# Altium PCB nRF52832_NanoDevKit.PcbDoc
Units mil, origin at the board's own origin, x right, y up, seen from the top; angles counter-clockwise.
Board outline 2860 x 1730 mil, 2 copper layers (Top Layer, Bottom Layer); 54 components, 64 nets, 215 pads, 168 vias.
Unrouted connection lines stored in the file: 6.
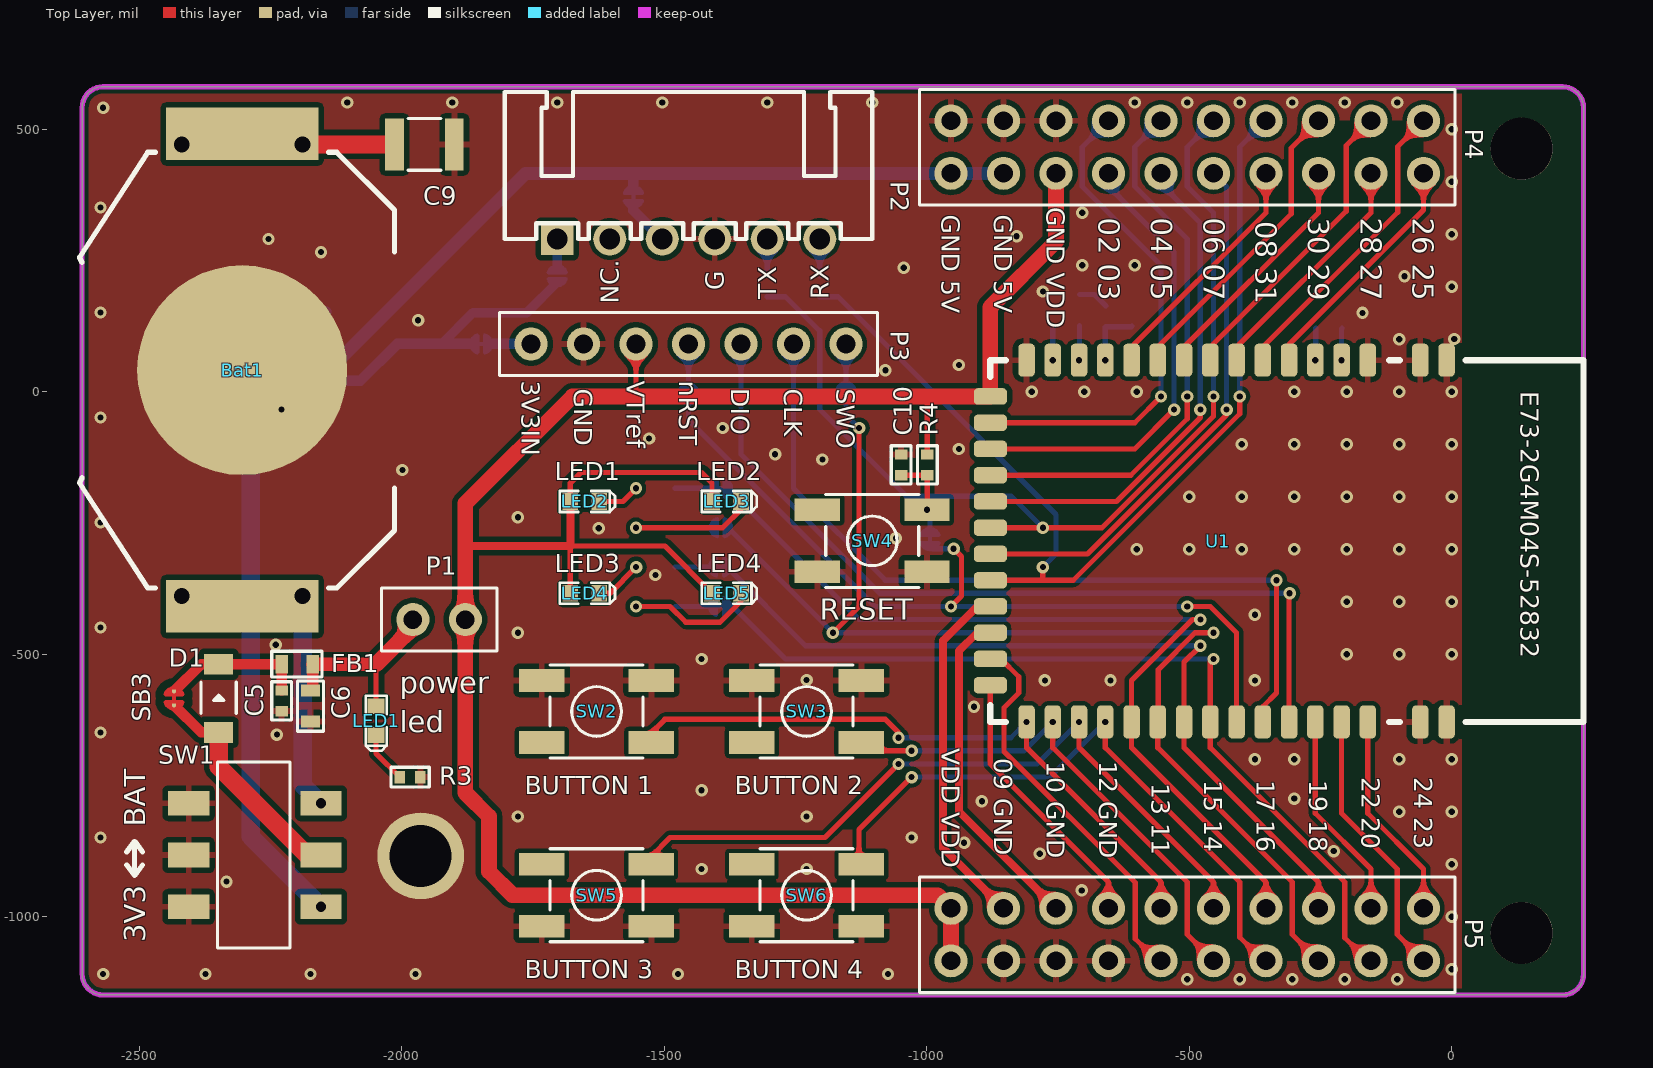
[diagram p0: Top Layer view]
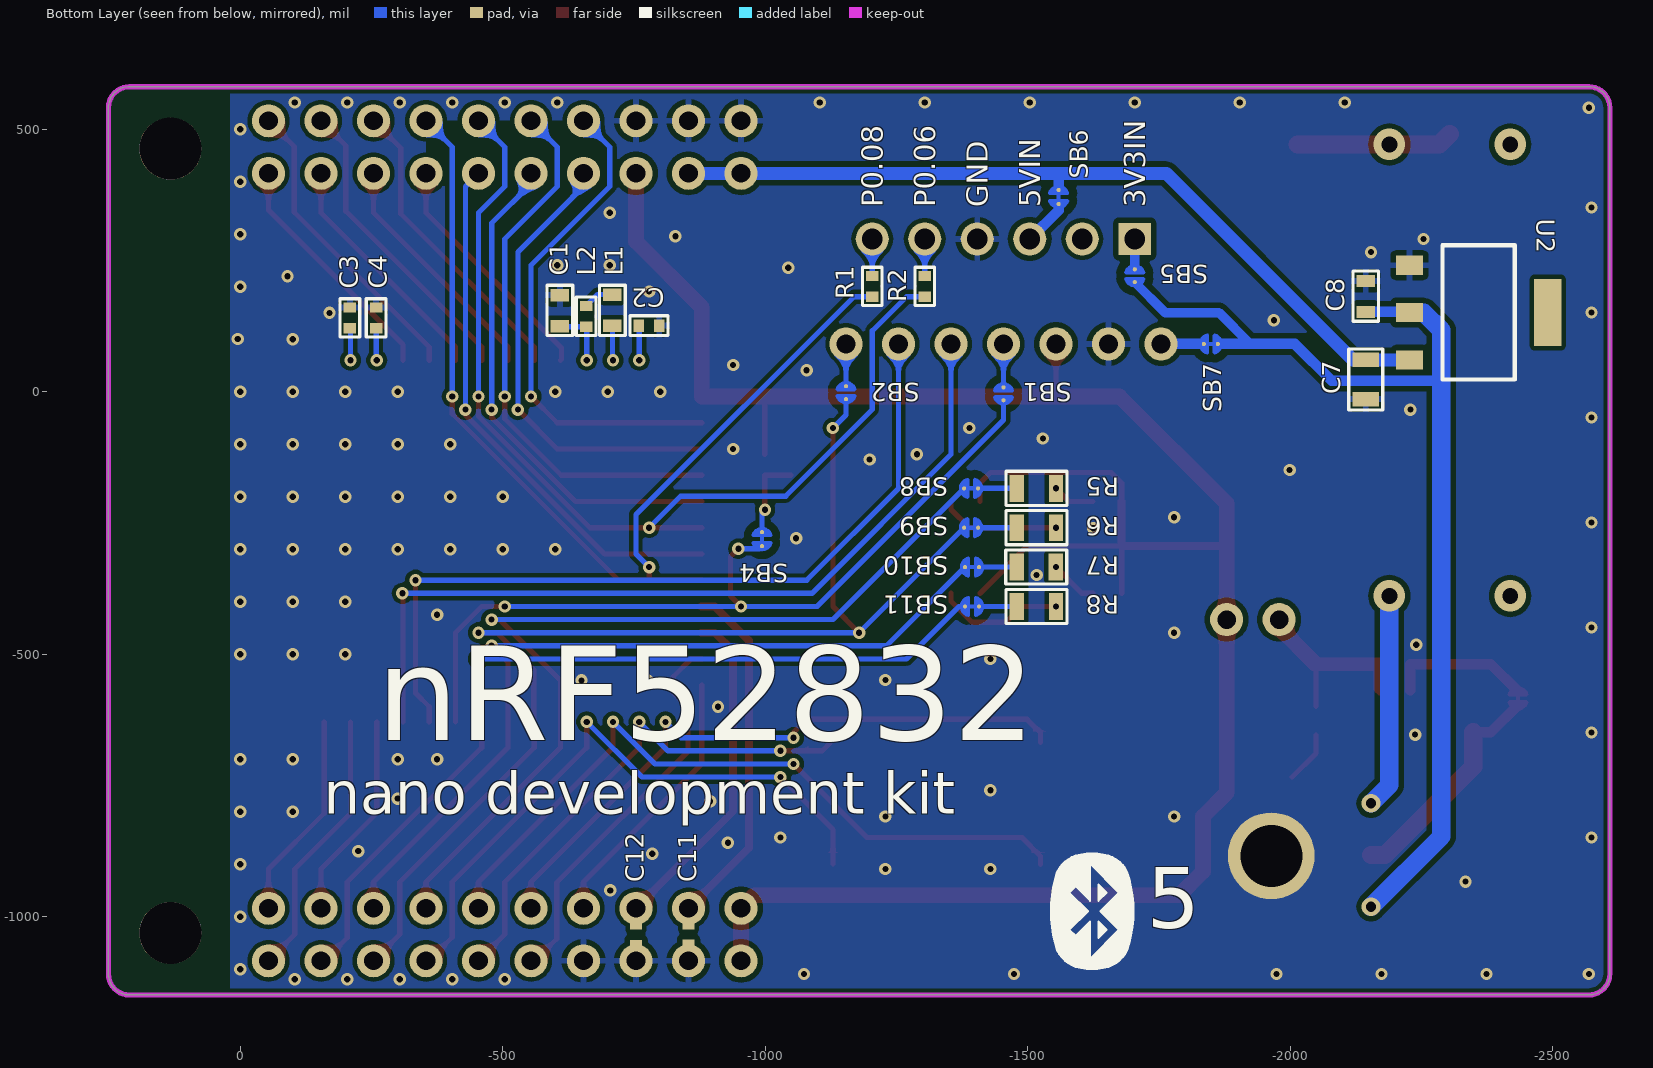
[diagram p1: Bottom Layer view, seen from below]

## Layer stack, top to bottom
Top Solder: solder mask 0.4, Solder Resist, Dk 3.5
Top Layer: signal copper 1.4
Dielectric 1: dielectric 12.6, FR-4, Dk 4.8
Bottom Layer: signal copper 1.4
Bottom Solder: solder mask 0.4, Solder Resist, Dk 3.5

## Board outline
-2608.9,-1109.09 ccw(c-2568.9,-1109.09) -2568.9,-1149.09 211.1,-1149.09 ccw(c211.1,-1109.09) 251.1,-1109.09 251.1,540.91 ccw(c211.1,540.91) 211.1,580.91 -2568.9,580.91 ccw(c-2568.9,540.91) -2608.9,540.91

## Design rules (kind name [scope] priority, off if disabled: settings)
Clearance SB_Clearance [HasFootprint('Solderbridge_Shorted') or HasFootprint('Solderbridge')] p1: gap=6 ignorepadtopadclearanceinfootprint=FALSE except(15: Arc-Fill Arc-Poly Arc-Region Track-Fill Track-Poly Track-Region SMDPad-Fill SMDPad-Poly SMDPad-Region THPad-Fill THPad-Poly THPad-Region Via-Fill Via-Poly Via-Region Fill-Fill Fill-Poly Fill-Region Poly-Poly Poly-Region Region-Region)
Clearance Power_Clearance [InNet('V5V') or InNet('V3V3') or InNet('VBAT')  or InNet ('VDD_nRF') or InNet('CP2102_3V3') or InNet('CP2102_5V') or InNet('J-link 3V3') or InNet('NetD1_2') or InNet('NetC5_2') or InNet('NetC6_2')] p2: gap=10 ignorepadtopadclearanceinfootprint=FALSE
Clearance [All] p3: gap=6 ignorepadtopadclearanceinfootprint=FALSE except(8: Arc-Fill Arc-Poly Arc-Region Track-Fill Track-Poly Track-Region SMDPad-Fill SMDPad-Poly SMDPad-Region THPad-Fill THPad-Poly THPad-Region Via-Fill Via-Poly Via-Region Fill-Fill Fill-Poly Fill-Region Poly-Poly Poly-Region Region-Region)
PolygonConnect PolygonConnect_1 [HasFootprint('CR2032_HOLDER') or HasPad('Free-1')] p1: connectstyle=Direct reliefconductorwidth=10 reliefentries=4 polygonreliefangle="90 Angle" airgapwidth=10
PolygonConnect PolygonConnect_Via [isVia and InNet('GND')] p2: connectstyle=Direct reliefconductorwidth=10 reliefentries=4 polygonreliefangle="90 Angle" airgapwidth=10
PolygonConnect [All] p3: connectstyle=Relief reliefconductorwidth=12 reliefentries=4 polygonreliefangle="90 Angle" airgapwidth=10
RoutingVias [All] p1: holewidth=39.37 width=62.99 viastyle="Through Hole" minholewidth=11.81 minwidth=23.62 maxholewidth=19.68 maxwidth=35.43
SolderMaskExpansion [All] p1: expansion=4
Width [All] p1: maxlimit=50 minlimit=6 preferedwidth=10
30 further rules are at their usual default settings.

## Classes and differential pairs
component class nRF52832&pin_map: C1 C2 C3 C4 L1 L2 R1 R2 SB1 SB2 U1
component class misc: Bat1 C5 C6 C7 C8 C9 C10 C11 C12 D1 FB1 LED1 LED2 LED3 LED4 LED5 P1 P2 P3 P4 P5 R3 R4 R5 R6 R7 R8 SB3 SB4 SB5 SB6 SB7 SB8 SB9 SB10 SB11 SW1 SW2 SW3 SW4 SW5 SW6 U2

## Components (designator, comment, footprint, x,y, rotation, side; value= is the part's Value field where it differs from the comment)
Bat1 "CR2032 Holder" CR2032_HOLDER -2303.9,40.91 r270 top locked
C1 "1µF" 0603_Imperial -608.9,183.98 r270 bottom
C2 "100nF" "0402 imperial" -798.27,125.91 r0 bottom
C3 "N.C." "0402 imperial" -208.9,160.28 r270 bottom
C4 "100pF" "0402 imperial" -258.9,160.28 r270 bottom
C5 "100nF" "0402 imperial" -2228.9,-608.46 r90 top
C6 "1µF" 0603_Imperial -2173.9,-628.15 r90 top
C7 "10µF" 0805_Imperial -2143.9,-14.09 r90 bottom
C8 "4.7µF" 0603_Imperial -2143.9,210.91 r270 bottom
C9 "100µF" 1210_Imperial -1899.72,470.91 r180 top
C10 "100nF" "0402 imperial" -1048.9,-119.72 r270 top
C11 "Ctuning" "0402 imperial" -853.9,-1014.09 r270 bottom
C12 "Ctuning" "0402 imperial" -753.9,-1054.09 r90 bottom
D1 "DIODE S4" SOD-123 -2348.9,-519.09 r270 top
FB1 "470R/3A" 0603_Imperial -2228.9,-519.09 r0 top
L1 "10µH" 0603_Imperial -708.9,125.91 r90 bottom
L2 "15nH" "0402 imperial" -658.9,163.31 r270 bottom
LED1 "Green" LED_0603 -2048.9,-654.09 r90 top
LED2 "LED1" LED_0603 -1623.9,-209.09 r180 top
LED3 "LED2" LED_0603 -1353.9,-209.09 r180 top
LED4 "LED3" LED_0603 -1623.9,-384.09 r180 top
LED5 "LED4" LED_0603 -1353.9,-384.09 r180 top
P1 "current measurement" CONN2.54MM2P -1978.9,-434.09 r0 top
P2 "6p, 2.54mm" CONNX2.54MM6P -1203.9,290.91 r0 top
P3 "for J-link" CONN2.54MM7P -1753.9,90.91 r0 top
P4 "10x2, 2.54mm" CONN2.54MM10X2 -53.9,515.91 r180 top
P5 "10x2, 2.54mm" CONN2.54MM10X2 -53.9,-984.09 r180 top
R1 "0R" "0402 imperial" -1203.9,180.91 r90 bottom
R2 "0R" "0402 imperial" -1303.9,180.91 r90 bottom
R3 "15K" "0402 imperial" -1964.53,-734.09 r180 top
R4 "100K" "0402 imperial" -998.9,-159.09 r90 top
R5 "680R" 0805_Imperial -1479.09,-184.09 r180 bottom
R6 "10K" 0805_Imperial -1479.09,-259.09 r180 bottom
R7 "1K" 0805_Imperial -1478.9,-334.09 r180 bottom
R8 "1K" 0805_Imperial -1479.09,-409.09 r180 bottom
SB1 "Solderbridge" Solderbridge#1 -1453.9,-4.09 r270 bottom
SB2 "Solderbridge" Solderbridge#2 -1153.9,-1.79 r270 bottom
SB3 "Solderbridge" Solderbridge_Shorted -2433.9,-584.09 r270 top net-tie
SB4 "Solderbridge" Solderbridge_Shorted -993.9,-280.79 r270 bottom net-tie
SB5 "Solderbridge" Solderbridge#2 -1703.9,220.91 r90 bottom
SB6 "Solderbridge" Solderbridge_Shorted -1558.9,370.91 r270 bottom net-tie
SB7 "Solderbridge" Solderbridge_Shorted -1848.9,90.91 r0 bottom net-tie
SB8 "Solderbridge" Solderbridge_Shorted -1392.2,-184.09 r0 bottom net-tie
SB9 "Solderbridge" Solderbridge_Shorted -1392.2,-259.09 r0 bottom net-tie
SB10 "Solderbridge" Solderbridge_Shorted -1393.9,-334.09 r0 bottom net-tie
SB11 "Solderbridge" Solderbridge_Shorted -1393.9,-409.09 r0 bottom net-tie
SW1 "MSS22D18" MSS22D18SMD -2153.9,-784.09 r90 top
SW2 "BUTTON 1" Switch-PB-4.5x4.5mm-SMD -1628.9,-609.09 r180 top
SW3 "BUTTON 2" Switch-PB-4.5x4.5mm-SMD -1228.9,-609.09 r180 top
SW4 "RESET" Switch-PB-4.5x4.5mm-SMD -1103.9,-284.09 r0 top
SW5 "BUTTON 3" Switch-PB-4.5x4.5mm-SMD -1628.9,-959.09 r0 top
SW6 "BUTTON 4" Switch-PB-4.5x4.5mm-SMD -1228.9,-959.09 r0 top
U1 "E73-2G4M04S1B" nRF52832-Ebyte -878.9,-9.09 r270 top locked
U2 "AMS1117-3.3" SOT229P700X180-4N -2358.9,150.91 r270 bottom

## Footprints (in the part's own frame and the unit in brackets; to place one, negate y for a bottom-side part, rotate by r counter-clockwise, add the part's x,y. Pads: shape width x height; smd on the part's side, far side on the other; paste and mask are expansions set on the pad)
"0402 imperial" [mm] "R, L, C"
  rect 0.5x0.6 smd: 1(0,0) 2(1,0)
  silkscreen extent -0.43,-0.48 1.43,0.48, body extent 0,-0.25 1,0.25, height 0.35
0603_Imperial [mm]
  rect 0.6x0.9 smd: 1(0,0) 2(1.5,0)
  silkscreen extent -0.48,-0.63 1.95,0.63, body extent -0.02,-0.42 1.53,0.43, height 0.35
0805_Imperial [mm]
  rect 0.7x1.3 smd: 1(0,0) 2(1.9,0)
  silkscreen extent -0.53,-0.82 2.42,0.82, body extent -0.05,-0.6 1.95,0.6, height 0.45
1210_Imperial [mm]
  rect 0.9x2.5 smd: 1(0,0) 2(2.9,0)
  silkscreen extent 0.65,-1.25 2.25,1.25, body extent -0.15,-1.25 3.05,1.25, height 0.55
CONN2.54MM2P [mm]
  round 1.6 hole 0.9: 1(0,0) 2(2.54,0)
  silkscreen extent -1.52,-1.52 4.06,1.52, body extent -1.27,-1.27 3.81,1.27, height 8.5
CONN2.54MM7P [mm]
  round 1.6 hole 0.9: 1(0,0) 2(2.54,0) 3(5.08,0) 4(7.62,0) 5(10.16,0) 6(12.7,0) 7(15.24,0)
  silkscreen extent -1.52,-1.52 16.76,1.52, body extent -1.27,-1.27 16.51,1.27, height 8.5
CONN2.54MM10X2 [mm]
  round 1.6 hole 0.9: 1(0,0) 2(0,2.54) 3(2.54,0) 4(2.54,2.54) 5(5.08,0) 6(5.08,2.54) 7(7.62,0) 8(7.62,2.54) 9(10.16,0) 10(10.16,2.54) 11(12.7,0) 12(12.7,2.54) 13(15.24,0) 14(15.24,2.54) 15(17.78,0) 16(17.78,2.54) 17(20.32,0) 18(20.32,2.54) 19(22.86,0) 20(22.86,2.54)
  silkscreen extent -1.52,-1.52 24.38,4.06, body extent -1.27,-1.27 24.13,3.81, height 8.5
CONNX2.54MM6P [mm]
  rect 1.55x1.55 hole 1: 1(-12.7,0)
  round 1.6 hole 1: 2(-10.16,0) 3(-7.62,0) 4(-5.08,0) 5(-2.54,0) 6(0,0)
  silkscreen extent -15.24,0 2.54,7.11, body extent -14.99,0.25 2.79,7.37, height 6
CR2032_HOLDER [mil] "BK-912 @ tme"
  rect 100x290 smd: 1(-450,0) 1(450,0)
  round 400 smd: 2(0,0)
  silkscreen extent -415,-310 415,290, body extent -455,-310 455,290, height 170
LED_0603 [mil]
  rect 30x32 smd: 1(0,0) 2(55,0)
  silkscreen extent -30,-20 75,20, body extent -4,-16 60,16, height 24
MSS22D18SMD [mm]
  rect 1.2x2 smd: 1(0,0) 2(-2.5,0) 3(-5,0) 4(0,6.4) 5(-2.5,6.4) 6(-5,6.4)
  silkscreen extent -7,1.5 2,5, body extent -6.75,0.1 1.75,6.35, height 3.5
nRF52832-Ebyte [mm]
  rrect50% 1.6x0.8 smd: 0(-1.755,22.07) 1(-1.755,20.8) 2(-1.755,18.26) 3(-1.755,16.99) 4(-1.755,15.72) 5(-1.755,14.45) 6(-1.755,13.18) 7(-1.755,11.91) 8(-1.755,10.64) 9(-1.755,9.37) 10(-1.755,8.1) 11(-1.755,6.83) 12(-1.755,5.56) 13(-1.755,4.29) 14(-1.755,3.02) 15(-1.755,1.75) 28(15.745,1.75) 29(15.745,3.02) 30(15.745,4.29) 31(15.745,5.56) 32(15.745,6.83) 33(15.745,8.1) 34(15.745,9.37) 35(15.745,10.64) 36(15.745,11.91) 37(15.745,13.18) 38(15.745,14.45) 39(15.745,15.72) 40(15.745,16.99) 41(15.745,18.26) 42(15.745,20.8) 43(15.745,22.07)
  rrect50% 0.8x1.6 smd: 16(0,0) 17(1.27,0) 18(2.54,0) 19(3.81,0) 20(5.08,0) 21(6.35,0) 22(7.62,0) 23(8.89,0) 24(10.16,0) 25(11.43,0) 26(12.7,0) 27(13.97,0)
  silkscreen extent -1.76,0 15.75,28.7, body extent -1.76,0 15.75,28.7, height 2.6
SOD-123 [mm]
  rect 1x1.4 smd: 1(0,0) 2(3.3,0)
  silkscreen extent 0.87,-0.85 2.37,0.85, body extent 0.23,-0.85 3.08,0.85, height 1.35
Solderbridge#1 [mm]
  round 0.2 smd paste-10: 1(-0.312,0) 2(0.312,0)
  Top Layer region: 0.077,0.432 0.152,0.505 0.271,0.467 0.335,0.424 0.409,0.351 0.462,0.292 0.521,0.193 0.549,0.099 0.544,-0.122 0.518,-0.193 0.434,-0.33 0.351,-0.411 0.259,-0.469 0.157,-0.5 0.107,-0.483 0.077,-0.43
  Top Layer region: -0.077,-0.432 -0.152,-0.505 -0.271,-0.467 -0.335,-0.424 -0.409,-0.351 -0.462,-0.292 -0.521,-0.193 -0.549,-0.099 -0.544,0.122 -0.518,0.193 -0.434,0.33 -0.351,0.411 -0.259,0.469 -0.157,0.5 -0.107,0.483 -0.077,0.43
  Top Layer lines w0.152: 0.153,0.431 cw(c0.042,0) 0.487,0 cw(c0.042,0) 0.461,-0.149 cw(c0.042,0) 0.153,-0.431 ; -0.153,0.431 ccw(c-0.042,0) -0.487,0 ccw(c-0.042,0) -0.153,-0.431
Solderbridge#2 [mm]
  round 0.2 smd paste-10: 1(-0.312,0) 2(0.312,0)
  Top Layer region: 0.077,0.432 0.152,0.505 0.271,0.467 0.335,0.424 0.409,0.351 0.462,0.292 0.521,0.193 0.549,0.099 0.544,-0.122 0.518,-0.193 0.434,-0.33 0.351,-0.411 0.259,-0.469 0.157,-0.5 0.107,-0.483 0.077,-0.43
  Top Layer region: -0.077,-0.432 -0.152,-0.505 -0.271,-0.467 -0.335,-0.424 -0.409,-0.351 -0.462,-0.292 -0.521,-0.193 -0.549,-0.099 -0.544,0.122 -0.518,0.193 -0.434,0.33 -0.351,0.411 -0.259,0.469 -0.157,0.5 -0.107,0.483 -0.077,0.43
  Top Layer lines w0.152: 0.153,0.431 cw(c0.042,0) 0.487,0 cw(c0.042,0) 0.153,-0.431 ; -0.153,0.431 ccw(c-0.042,0) -0.487,0 ccw(c-0.042,0) -0.153,-0.431
Solderbridge_Shorted [mm]
  round 0.2 smd paste-10: 1(-0.338,0) 2(0.338,0)
  Top Layer region: 0.102,0.432 0.178,0.505 0.296,0.467 0.361,0.424 0.434,0.351 0.488,0.292 0.546,0.193 0.574,0.099 0.569,-0.122 0.544,-0.193 0.46,-0.33 0.376,-0.411 0.284,-0.469 0.183,-0.5 0.132,-0.483 0.102,-0.43
  Top Layer region: -0.102,-0.432 -0.178,-0.505 -0.296,-0.467 -0.361,-0.424 -0.434,-0.351 -0.488,-0.292 -0.546,-0.193 -0.574,-0.099 -0.569,0.122 -0.544,0.193 -0.46,0.33 -0.376,0.411 -0.284,0.469 -0.183,0.5 -0.132,0.483 -0.102,0.43
  Top Layer lines w0.152: 0.178,-0.431 ccw(c0.068,0) 0.178,0.431 ; -0.178,-0.431 cw(c-0.068,0) -0.178,0.431
  Top Layer lines w0.203: 0.338,0 -0.338,0
SOT229P700X180-4N [mm]
  rect 0.93x1.31 smd: 1(-2.285,-3.345) 2(0.005,-3.345) 3(2.295,-3.345)
  rect 3.24x1.31 smd: 4(0.005,3.345)
  silkscreen extent -3.25,-1.75 3.25,1.75
Switch-PB-4.5x4.5mm-SMD [mm] "Tactile Switch, SPNO, SMD, 4.5x4.5x3.8mm"
  rect 2.2x1.1 smd: 1(-2.65,1.5) 2(-2.65,-1.5) 3(2.65,1.5) 4(2.65,-1.5)
  silkscreen extent -2.25,-2.25 2.25,2.25, body extent -2.25,-2.25 2.25,2.25, height 3.8

## Part data
Bat1: library part "Bat Holder CR2032", "Bat Holder CR2032 SMD", Note="CR2032 Holder"
C1 C2 C3 C4 C5 C6 C7 C8 C9 C10 C11 C12: library part Capacitor, "common library", Tolerance=±5%
D1: library part "Diode Schottky", "common library"
FB1: library part "Ferrite Bead", "common library"
L1 L2: library part Inductor, "common library"
LED1: library part LED, "common library", Color=Green
LED2: library part LED, "common library", Color=Red, Name=LED1
LED3: library part LED, "common library", Color=Green, Name=LED2
LED4: library part LED, "common library", Color=Blue, Name=LED3
LED5: library part LED, "common library", Color=Yellow, Name=LED4
P1: library part "Headerx 2", "common library"
P2: library part "Header 6", "common library"
P3: library part "Header 7", "common library"
P4 P5: library part "Header 10x2", "common library"
R1 R2 R3 R4 R5 R6 R7 R8: library part Resistor, "common library", Tolerance=±5%
SB3 SB4 SB6 SB7 SB8 SB9 SB10 SB11: "Shorted Solderbridge", Part Number="Solderbridge Shorted", Artikkelnr Noca=N.A., Artikkelnr Simpro=N.A., Footprint Doc=Solderbridge_Shorted, LatestRevisionDate=2012-08-07, Pin Count=2, Published=2012-08-07, Publisher="Nordic Semiconductor"
SW1 SW2 SW3 SW4 SW5 SW6: "common library"
  SW1: Pin Count=6
  SW2 SW3 SW4 SW5 SW6: Pin Count=4
U1: library part nRF52832-Ebyte, "Ebyte E73-2G4M04S-52832", Manufacturer=EBYTE, Part Number=E73-2G4M04S1B, Type="nRF52832 module"
U2: library part AMS1117, "Low-dropout regulator", Type=AMS1117-3.3
SB1 SB2 SB5: Artikkelnr Noca=N.A., Artikkelnr Simpro=N.A., Footprint Doc=Solderbridge, LatestRevisionDate=2009-12-14, Part Number=Solderbridge, Pin Count=2, Published=2009-12-14, Publisher="Nordic Semiconductor"

## Free pads (board coordinates)
  round 165.35 hole 118.11: 1(-1963.9,-884.09)
  round 118.11 hole 118.11: 1(132.99,-1030.98) 1(132.99,462.8)

## Via types
v1: diameter 23.62, hole 11.81, Top Layer to Bottom Layer, tented both sides, 162 vias
v2: diameter 60, hole 30, Top Layer to Bottom Layer, 4 vias
v3: diameter 35.43, hole 19.68, Top Layer to Bottom Layer, tented both sides, 2 vias

## Nets (pads, with @x,y where several pads share a name; then routed paths per layer and width w, separated by ;. In a path a pad name is that pad's centre, name@x,y a point inside that pad or via, vN(x,y) a via of type N, cw(c..) or ccw(c..) an arc to the next point about the centre after c; other vN are vias at no path point)
CP2102_3V3: P2.1 SB5.2 | length 57.7
  Bottom Layer w18: SB5.2 -1703.9,240.08 P2.1
CP2102_5V: P2.3 SB6.2 | length 96.2
  Bottom Layer w20: SB6.2 -1558.9,345.91 P2.3 P2.3@-1503.9,297.61
CP2102RXD: P2.5 R2.2 | length 70.6
  Bottom Layer w10: R2.2 P2.5
CP2102TXD: P2.6 R1.2 | length 70.6
  Bottom Layer w10: R1.2 P2.6
DCC: L1.1 U1.13 | length 66.4
  Bottom Layer w10: v1(-710,60) -708.9,61.1 L1.1
DEC1: C2.2 U1.14 | length 66.4
  Bottom Layer w10: v1(-760,60) -760,124.8 C2.2
DEC2: C3.2 U1.3 | length 61.4
  Bottom Layer w10: v1(-210,60) -210,119.8 C3.2
DEC3: C4.2 U1.4 | length 61.4
  Bottom Layer w10: v1(-260,60) -258.9,61.1 C4.2
DEC4: C1.2 L2.2 U1.12 | length 114.8
  Bottom Layer w10: v1(-660,60) -660,122.83 L2.2 -609.88,123.94 C1.2
GND: Bat1.2 C1.1 C2.1 C3.1 C4.1 C5.1 C6.1 C7.1 C8.1 C9.1 C10.1 C11.2 C12.1 P2.4 P3.2 P4.15 P4.17 P4.19 P5.14 P5.16 P5.18 pad.1@-1963.9,-884.09 R3.1 SW1.4 SW1.5 SW1.6 SW2.2 SW2.4 SW3.2 SW3.4 SW4.2 SW4.4 SW5.2 SW5.4 SW6.2 SW6.4 U1.0 U1.1 U1.2 U1.15 U1.42 U1.43 U2.1
  other v1: -503.9,-1119.09 -403.9,-1119.09 -303.9,-1119.09 -203.9,-1119.09 -103.9,-1119.09 -2568.9,-1109.09 -2373.9,-1109.09 -2173.9,-1109.09 -1973.9,-1109.09 -1473.9,-1109.09 -1073.9,-1109.09 0,-1100 0,-1000 -705,-950 -2333.9,-933.09 -1428.9,-909.09 -1228.9,-909.09 0,-900 -785,-880 -225,-875 -928.9,-859.09 -2573.9,-849.09 -1028.9,-849.09 -1778.9,-809.09 -1228.9,-809.09 -100,-800 0,-800 -895,-780 -300,-775 -1428.9,-759.09 -375,-700 -300,-700 -100,-700 0,-700 -2237.9,-653.09 -2573.9,-649.09 -910,-600 -775,-550 -650,-550 -375,-550 -1228.9,-549.09 -1428.9,-509.09 -200,-500 -100,-500 0,-500 -2239.9,-482.09 -1778.9,-459.09 -2573.9,-449.09 -375,-425 -200,-400 -100,-400 0,-400 -1516.9,-349.09 -600,-300 -500,-300 -400,-300 -300,-300 -200,-300 -100,-300 0,-300 -1058.9,-279.09 -1625,-260 -2573.9,-249.09 -1778.9,-239.09 -500,-200 -400,-200 -300,-200 -200,-200 -100,-200 0,-200 -1998.9,-149.09 -1198.9,-129.09 -1288.9,-119.09 -938.9,-109.09 -400,-100 -300,-100 -200,-100 -100,-100 0,-100 -1528.9,-89.09 -1388.9,-69.09 -2573.9,-49.09 -2228.9,-34.09 -800,0 -700,0 -600,0 -300,0 -200,0 -100,0 0,0 -1078.9,40.91 -938.9,50.91 -100,100 4.85,100.46 -1968.9,135.91 -170,150 -2573.9,150.91 -778.9,190.91 0,200 -90,220 -1043.9,235.91 -703.9,240.91 -603.9,240.91 -2153.9,265.91 -2253.9,290.91 -828.9,295.91 0,300 -703.9,340.91 -2573.9,350.91 0,400 0,500 -2568.9,540.91 -2103.9,550.91 -1903.9,550.91 -1703.9,550.91 -1503.9,550.91 -1303.9,550.91 -1103.9,550.91 -603.9,550.91 -503.9,550.91 -403.9,550.91 -303.9,550.91 -203.9,550.91 -103.9,550.91
"J-link 3V3": P3.1 SB7.2 | length 81.7
  Bottom Layer w20: SB7.2 P3.1
"J-link nRST": P3.4 SB1.1 | length 82.7
  Bottom Layer w10: SB1.1 -1453.9,15.08 P3.4
"J-link SWCLK": P3.6 U1.37 | length 1548.2
  Top Layer w10: U1.37 -360,-600.2 -333.9,-574.09 v1(-333.9,-359.09)
  Bottom Layer w10: P3.6 -1253.9,-184.09 -1078.9,-359.09 v1(-333.9,-359.09)
"J-link SWDIO": P3.5 U1.38 | length 1611.7
  Top Layer w6: U1.38 U1.38@-308.9,-627.87
  Top Layer w10: U1.38 -310,-385.2 v1(-308.9,-384.09)
  Bottom Layer w10: P3.5 -1353.9,-119.09 -1088.9,-384.09 v1(-308.9,-384.09)
"J-link SWO": P3.7 SB2.1 | length 80.4
  Bottom Layer w10: SB2.1 -1153.9,17.38 P3.7
NetC5_2: C5.2 D1.1 FB1.1 SB3.1 | length 276.4
  Top Layer w20: SB3.1 -2382.2,-519.09 D1.1 FB1.1 C5.2
NetC6_2: C6.2 FB1.2 LED1.2 P1.1 | length 366.6
  Top Layer w10: LED1.2 -2048.9,-519.09
  Top Layer w22: C6.2 -2169.84,-565.04 FB1.2
  Top Layer w25: FB1.2 -2048.9,-519.09
  Top Layer w30: -2048.9,-519.09 -1978.9,-449.09 P1.1
NetC10_2: C10.2 R4.1 SB4.1 SW4.1 SW4.3 | length 161
  Top Layer w10: C10.2 R4.1 -998.9,-224.37 v1(-999.57,-225.04)
  Bottom Layer w10: v1(-999.57,-225.04) -993.9,-230.71 SB4.1
NetD1_2: D1.2 SB3.2 SW1.2 | length 436.2
  Top Layer w20: SB3.2 -2382.28,-649.02 D1.2
  Top Layer w35: D1.2 -2348.9,-714.09 -2180.47,-882.52 SW1.2
NetL1_2: L1.2 L2.1 | length 59
  Bottom Layer w10: L1.2 -680.55,184.96 L2.1
NetLED1_1: LED1.1 R3.2 | length 98.6
  Top Layer w10: LED1.1 -2048.9,-689.09 R3.2
NetLED2_1: LED2.1 R5.2 | length 80.4
  Top Layer w10: LED2.1 -1578.9,-209.09 v1(-1553.9,-184.09)
NetLED3_1: LED3.1 R6.2 | length 229.5
  Top Layer w10: v1(-1553.9,-259.09) -1388.9,-259.09 -1353.9,-224.09 LED3.1
NetLED4_1: LED4.1 R7.2 | length 90.9
  Top Layer w10: LED4.1 -1603.7,-384.09 v1(-1553.7,-334.09)
NetLED5_1: LED5.1 R8.2 | length 244
  Top Layer w10: v1(-1553.9,-409.09) -1488.9,-409.09 -1458.9,-439.09 -1393.9,-439.09 -1353.9,-399.09 LED5.1
NetP2_2: P2.2
NetR5_1: R5.1 SB8.1 | length 73.6
  Bottom Layer w10: R5.1 SB8.1
NetR6_1: R6.1 SB9.1 | length 73.6
  Bottom Layer w10: R6.1 SB9.1
NetR7_1: R7.1 SB10.1 | length 71.7
  Bottom Layer w10: R7.1 SB10.1
NetR8_1: R8.1 SB11.1 | length 71.9
  Bottom Layer w10: R8.1 SB11.1
P0.02: P4.13 U1.17 | length 953.6
  Top Layer w10: U1.17 -603.9,-59.09 v1(-553.9,-9.09)
  Bottom Layer w10: P4.13 -703.9,465.91 -703.9,390.91 -553.9,240.91 v1(-553.9,-9.09)
P0.03: P4.14 U1.18 | length 882.8
  Top Layer w10: U1.18 -603.9,-109.09 v1(-528.9,-34.09)
  Bottom Layer w10: P4.14 -653.9,390.91 -528.9,265.91 v1(-528.9,-34.09)
P0.04: P4.11 U1.19 | length 1049.1
  Top Layer w10: U1.19 -611.52,-159.09 -503.9,-51.47 v1(-503.9,-9.09)
  Bottom Layer w10: P4.11 -603.9,465.91 -603.9,390.91 -503.9,290.91 v1(-503.9,-9.09)
P0.05: P4.12 U1.20 | length 962.3
  Top Layer w10: U1.20 -638.9,-209.09 -478.9,-49.09 v1(-478.9,-34.09)
  Bottom Layer w10: P4.12 -553.9,395.91 -478.9,320.91 v1(-478.9,-34.09)
P0.06: P4.9 R2.1 U1.21 | length 1912.1
  Top Layer w10: U1.21 v1(-778.9,-259.09) -666.27,-259.09 -453.9,-46.72 v1(-453.9,-9.09)
  Bottom Layer w10: R2.1 -1268.9,180.91 -1203.9,115.91 -1203.9,-34.09 -1038.9,-199.09 -838.9,-199.09 v1(-778.9,-259.09) ; v1(-453.9,-9.09) -453.9,340.91 -503.9,390.91 -503.9,465.91 P4.9
P0.07: P4.10 U1.22 | length 1030.3
  Top Layer w10: U1.22 -693.64,-309.09 -428.9,-44.35 v1(-428.9,-34.09)
  Bottom Layer w10: P4.10 -428.9,390.91 v1(-428.9,-34.09)
P0.08: P4.7 R1.1 U1.23 | length 1942.2
  Top Layer w10: U1.23 -778.9,-359.09 ; v1(-778.9,-334.09) -778.9,-359.09 ; v1(-403.9,-9.09) -403.9,-41.98 -721.02,-359.09 -778.9,-359.09
  Bottom Layer w10: R1.1 -1168.9,180.91 -753.9,-234.09 -753.9,-309.09 v1(-778.9,-334.09) ; v1(-403.9,-9.09) -403.9,465.91 P4.7
P0.09/NFC1: C11.1 P5.17 U1.24 | length 674.6
  Top Layer w15: U1.24 -903.9,-409.09 -968.9,-474.09 -968.9,-869.09 P5.17
P0.10/NFC2: C12.2 P5.15 U1.25 | length 641.1
  Top Layer w15: U1.25 -903.9,-459.09 -938.9,-494.09 -938.9,-799.09 P5.15
P0.11: P5.12 U1.26 | length 748.6
  Top Layer w10: U1.26 -858.9,-509.09 -824.9,-543.09 -824.9,-574.09 -852.9,-602.09 -852.9,-685.09 -602.9,-935.09 -602.9,-1042.09 -560.9,-1084.09 P5.12
P0.12: P5.13 U1.27 | length 518.2
  Top Layer w10: U1.27 -878.9,-709.09 -653.9,-934.09 P5.13
P0.13: P5.11 SW2.1 SW2.3 U1.28 | length 1237.6
  Top Layer w10: SW2.1 -1524.57,-649.76 -1498.9,-624.09 -1078.9,-624.09 -1053.9,-649.09 v1(-1053.9,-659.09) ; v1(-810,-628.98) -810,-677.99 -553.9,-934.09 P5.11
  Bottom Layer w10: v1(-1053.9,-659.09) -840.12,-659.09 v1(-810,-628.98)
P0.14: P5.10 SW3.1 SW3.3 U1.29 | length 975.9
  Top Layer w10: SW3.1 -1108.62,-684.09 v1(-1028.9,-684.09) ; v1(-760,-628.98) -760,-677.99 -503.9,-934.09 -503.9,-1034.09 P5.10
  Bottom Layer w10: v1(-1028.9,-684.09) -815.12,-684.09 v1(-760,-628.98)
P0.15: P5.9 SW5.1 SW5.3 U1.30 | length 1397
  Top Layer w10: SW5.3 -1524.57,-884.76 -1488.9,-849.09 -1193.9,-849.09 v1(-1053.9,-709.09) ; v1(-710,-628.98) -710,-677.99 -453.9,-934.09 P5.9
  Bottom Layer w10: v1(-1053.9,-709.09) -790.12,-709.09 v1(-710,-628.98)
P0.16: P5.8 SW6.1 SW6.3 U1.31 | length 1203.7
  Top Layer w10: SW6.3@-1128.9,-899.09 -1128.9,-834.09 v1(-1028.9,-734.09) ; v1(-660,-628.98) -660,-677.99 -403.9,-934.09 -403.9,-1039.09 -358.9,-1084.09 P5.8
  Bottom Layer w10: v1(-1028.9,-734.09) -765.12,-734.09 v1(-660,-628.98)
P0.17: P5.7 SB8.2 U1.32 | length 1722.7
  Top Layer w10: v1(-478.9,-434.09) -493.9,-434.09 -610,-550.2 U1.32 -610,-677.99 -353.9,-934.09 P5.7
  Bottom Layer w10: SB8.2 -1128.9,-434.09 v1(-478.9,-434.09)
P0.18: P5.6 SB2.2 SB9.2 U1.33 | length 2300.2
  Top Layer w10: v1(-1178.9,-459.09) -1128.9,-409.09 v1(-1128.9,-69.09) ; v1(-453.9,-459.09) -488.9,-459.09 -558.9,-529.09 -558.9,-627.87 U1.33 -560,-677.99 -303.9,-934.09 -303.9,-1034.09 P5.6
  Bottom Layer w10: SB9.2 v1(-1178.9,-459.09) v1(-453.9,-459.09) ; SB2.2 -1153.9,-20.96 -1153.9,-44.09 v1(-1128.9,-69.09)
P0.19: P5.5 SB10.2 U1.34 | length 1582.8
  Top Layer w10: v1(-478.9,-484.09) -510,-515.2 U1.34 -510,-677.99 -253.9,-934.09 P5.5
  Bottom Layer w10: SB10.2 -1230.6,-484.09 v1(-478.9,-484.09)
P0.20: P5.4 SB11.2 U1.35 | length 1676
  Top Layer w10: v1(-453.9,-509.09) -460,-515.2 U1.35 -460,-677.99 -203.9,-934.09 -203.9,-1040.09 -159.9,-1084.09 P5.4
  Bottom Layer w10: SB11.2 -1368.9,-409.09 -1268.9,-509.09 v1(-453.9,-509.09)
P0.21/nRST: SB1.2 SB4.2 U1.36 | length 1590.8
  Top Layer w10: v1(-953.9,-409.09) -933.9,-389.09 -933.9,-314.09 v1(-948.9,-299.09) ; v1(-503.9,-409.09) -460,-409.09 -410,-459.09 U1.36
  Bottom Layer w10: SB1.2 -1453.9,-23.26 -1453.9,-54.09 -1098.9,-409.09 v1(-953.9,-409.09) v1(-503.9,-409.09) ; SB4.2 -988.9,-299.09 v1(-948.9,-299.09)
P0.22: P5.3 U1.39 | length 399.1
  Top Layer w10: U1.39 -260,-802.99 -153.9,-909.09 P5.3
P0.23: P5.2 U1.40 | length 519.8
  Top Layer w10: U1.40 -210,-802.99 -103.9,-909.09 -103.9,-1034.09 P5.2
P0.24: P5.1 U1.41 | length 399.1
  Top Layer w10: U1.41 -160,-802.99 -53.9,-909.09 P5.1
P0.25: P4.2 U1.5 | length 462
  Top Layer w10: U1.5 -310,89.8 -53.9,345.91 P4.2
P0.26: P4.1 U1.6 | length 582.7
  Top Layer w10: U1.6 -360,84.8 -102.9,341.91 -102.9,466.91 P4.1
P0.27: P4.4 U1.7 | length 462
  Top Layer w10: U1.7 -410,84.8 -153.9,340.91 P4.4
P0.28: P4.3 U1.8 | length 582.7
  Top Layer w10: U1.8 -460,84.8 -200.9,343.91 -200.9,468.91 P4.3
P0.29: P4.6 U1.9 | length 462
  Top Layer w10: U1.9 -510,84.8 -253.9,340.91 P4.6
P0.30: P4.5 U1.10 | length 582.7
  Top Layer w10: U1.10 -560,84.8 -305.9,338.91 -305.9,463.91 P4.5
P0.31: P4.8 U1.11 | length 463.6
  Top Layer w10: U1.11 -611.9,61.9 -611.9,82.91 -353.9,340.91 P4.8
V3V3: C8.2 SB5.1 SB7.1 SW1.3 U2.2 | length 2035.3
  Bottom Layer w18: U2.2 U2.2@-2226.06,151.85 ; -1923.9,90.91 -1864.09,150.71 -1761.79,150.71 SB5.1
  Bottom Layer w20: -2287.9,20.91 -2078.9,20.91 -2008.9,90.91 -1923.9,90.91 SB7.1 ; U2.2@-2226.06,151.85 C8.2
  Bottom Layer w35: U2.2 -2254.09,150.71 -2287.9,116.91 -2287.9,20.91 -2287.9,-846.94 v3(-2153.9,-980.94)
V5V: C7.2 P4.18 P4.20 SB6.1 U2.3 | length 1552.2
  Bottom Layer w20: U2.3 U2.3@-2227.05,60.71 ; SB6.1 -1558.9,415.91
  Bottom Layer w25: U2.3@-2227.05,60.71 C7.2 -2119.09,60.71 -1763.9,415.91 -1558.9,415.91 P4.20 P4.18
VBAT: Bat1.1 C9.2 SW1.1 | length 707.8
  Top Layer w35: Bat1.1@-2303.9,490.91 -2283.9,470.91 v2(-2188.9,470.91) C9.2
  Bottom Layer w35: v2(-2188.9,-389.09) -2188.9,-749.09 v3(-2153.9,-784.09)
  other v2: -2418.9,-389.09 -2418.9,470.91
VDD_nRF: LED2.2 LED3.2 LED4.2 LED5.2 P1.2 P3.3 P4.16 P5.19 P5.20 R4.2 U1.16 | length 4534.4
  Top Layer w10: LED4.2 -1678.9,-294.09 -1498.9,-294.09 LED5.2 ; LED2.2 -1678.9,-174.09 -1658.9,-154.09 -1428.9,-154.09 -1408.9,-174.09 LED3.2 ; -1553.9,-4.09 P3.3 ; R4.2 -998.9,-9.09
  Top Layer w15: -1878.9,-294.09 -1678.9,-294.09 LED2.2
  Top Layer w30: P5.20 P5.19 -978.9,-959.09 -1788.9,-959.09 -1833.9,-914.09 -1833.9,-809.09 -1878.9,-764.09 P1.2 -1878.9,-294.09 -1878.9,-213.09 -1674.9,-9.09 -998.9,-9.09 U1.16 -878.9,160.91 -753.9,285.91 P4.16
pads on no net: U2.4

## Polygon pours and split planes (outlines as drawn)
GND on Bottom Layer "Bottom Layer-GND" (solid, remove dead copper, pour order 2): 333.7,699.57 333.7,-1253.19 -2685.98,-1253.19 -2685.98,699.57
GND on Top Layer "Top Layer-GND" (solid, remove dead copper, pour order 0): 345.51,683.82 345.51,-1268.94 -2674.17,-1268.94 -2674.17,683.82

## Keep-outs
Keep-Out Layer:
  the board outline again, w10

## Other copper
Top Layer:
  pour cut-out: -1563.1,-294.91 -1498.1,-294.91 -1498.1,-255 -1563.1,-255
  pour cut-out: -1606.9,-190.09 -1671.9,-190.09 -1671.9,-230 -1606.9,-230
  pour cut-out: -553.9,45.91 -553.9,-9.09 -403.9,-9.09 -403.9,45.91
  pour cut-out: -1612.9,-408.09 -1668.9,-408.09 -1668.9,-367.09 -1612.9,-367.09
  pour cut-out: -1353.9,-361.09 -1408.9,-361.09 -1408.9,-410.09 -1353.9,-410.09
  pour cut-out: -1356.9,-185.09 -1421.9,-185.09 -1421.9,-225 -1356.9,-225
  pour cut-out: -1038.9,-127.09 -1002.9,-127.09 -1002.9,-146.09 -1038.9,-146.09
  pour cut-out: -553.9,-984.09 -53.9,-984.09 -53.9,-1084.09 -553.9,-1084.09
  pour cut-out: -253.9,515.91 -53.9,515.91 -53.9,415.91 -253.9,415.91
  pour cut-out: 18.74,636.57 306.14,636.57 306.14,-1182.32 18.74,-1182.32
  pour cut-out: -1128.9,-834.09 -1177.9,-834.09 -1177.9,-830.09 -1143.9,-796.09 -1089.9,-796.09
Bottom Layer:
  pour cut-out: -653.9,515.91 -353.9,515.91 -353.9,415.91 -653.9,415.91
  pour cut-out: -1990.9,110.91 -2083.9,110.91 -2083.9,76.91 -1990.9,76.91
  pour cut-out: 18.74,636.57 306.14,636.57 306.14,-1182.32 18.74,-1182.32
  pour cut-out: -849.9,-186.09 -803.9,-186.09 -773.9,-216.09
  pour cut-out: -1500.9,-185.09 -1500.9,-407.09 -1431.9,-407.09 -1431.9,-185.09

## Silkscreen, mask and mechanical layers (free items; w line width, h text height)
Top Overlay:
  lines w10: -2523.9,-901.59 -2508.9,-921.59 ; -2523.9,-876.59 -2508.9,-856.59 ; -2493.9,-901.59 -2508.9,-921.59 ; -2493.9,-876.59 -2508.9,-856.59 ; -2508.9,-921.59 -2508.9,-856.59
  text "GND VDD" at -771.95,350.91 h35 r270
  text "GND 5V" at -971.39,336.74 h35 r270
  text "GND 5V" at -871.67,336.74 h35 r270
  text "02 03" at -672.23,330.91 h40 r270
  text "04 05" at -572.5,330.91 h40 r270
  text "06 07" at -472.78,330.91 h40 r270
  text "30 29" at -273.34,330.91 h40 r270
  text "28 27" at -173.61,330.91 h40 r270
  text "26 25" at -73.89,330.91 h40 r270
  text "08 31" at -373.06,324.24 h40 r270
  text "G" at -1386.4,193.4 h35 r90
  text "TX" at -1286.4,175.91 h35 r90
  text "RX" at -1186.4,175.91 h35 r90
  text "NC." at -1586.4,167.16 h35 r90
  text "3V3IN" at -1771.39,20.91 h35 r270
  text "VTref" at -1571.39,20.91 h35 r270
  text "nRST" at -1471.39,20.91 h35 r270
  text "DIO" at -1372.39,6.91 h35 r270
  text "GND" at -1671.39,5.91 h35 r270
  text "CLK" at -1271.39,5.91 h35 r270
  text "SWO" at -1171.39,5.91 h35 r270
  text "E73-2G4M04S-52832" at 131.1,0.91 h35 r270
  text "power" at -2003.9,-574.09 h40
  text "led" at -2003.9,-649.09 h40
  text "VDD VDD" at -971.39,-679.09 h35 r270
  text "09 GND" at -871.39,-698.26 h35 r270
  text "10 GND" at -771.39,-704.09 h35 r270
  text "12 GND" at -671.39,-704.09 h35 r270
  text "22 20" at -171.39,-734.09 h35 r270
  text "24 23" at -71.39,-734.09 h35 r270
  text "15 14" at -471.39,-739.93 h35 r270
  text "17 16" at -371.39,-739.93 h35 r270
  text "19 18" at -271.39,-739.93 h35 r270
  text "13 11" at -571.39,-745.76 h35 r270
  text "BAT" at -2488.9,-829.09 h40 r90
  text "3V3" at -2488.9,-1049.09 h40 r90
Bottom Overlay:
  region: -1579.41,-954.09 -1614.84,-989.53 -1580.39,-1023.98
  region: -1591.22,-1036.77 -1618.78,-1080.08 -1618.78,-1009.21
  region: -1673.9,-954.09 -1673.9,-1024.96 -1638.46,-989.53
  region: -1618.78,-898.98 -1591.22,-942.28 -1618.78,-969.84
  region: -1634.53,-969.84 -1650.28,-954.09 -1634.53,-938.35
  region: -1634.53,-1040.71 -1650.28,-1024.96 -1634.53,-1009.21
  region: -1579.41,-1024.96 -1546.93,-1033.82 -1558.74,-1071.22 -1581.38,-1091.89 -1615.83,-1100.75 -1620.75,-1099.76 -1618.78,-1080.08 -1591.22,-1036.77
  region: -1618.78,-1080.08 -1620.75,-1099.76 -1643.39,-1098.78 -1667.01,-1089.92 -1678.82,-1079.09 -1689.35,-1064.23 -1698.5,-1029.88 -1673.9,-1024.96
  region: -1698.5,-1025.94 -1701.46,-995.43 -1698.5,-953.11 -1673.9,-954.09 -1673.9,-1024.96 -1698.5,-1029.88
  region: -1673.9,-954.09 -1698.5,-953.11 -1689.35,-914.82 -1673.9,-894.06 -1647.32,-881.26 -1618.78,-879.29 -1618.78,-898.98
  region: -1618.78,-898.98 -1618.78,-879.29 -1582.36,-886.18 -1558.74,-906.85 -1551.85,-927.52 -1546.93,-949.17 -1579.41,-954.09 -1591.22,-942.28
  region: -1546.93,-949.17 -1579.41,-954.09 -1580.39,-1023.98 -1575.47,-1028.9 -1546.93,-1033.82 -1543.98,-984.61
  lines w3.94: -1689.35,-1064.23 cw(c-1464.84,-989.53) -1689.35,-914.82 cw(c-1632.59,-943.24) -1654.13,-883.53 cw(c-1622.72,-997.89) -1591.3,-883.53 cw(c-1612.84,-943.24) -1556.08,-914.82 cw(c-1780.59,-989.53) -1556.08,-1064.23 cw(c-1612.84,-1035.81) -1591.3,-1095.53 cw(c-1622.72,-981.16) -1654.13,-1095.53 cw(c-1632.59,-1035.81) -1689.35,-1064.23 ; -1673.9,-1024.96 -1638.46,-989.53 -1673.9,-954.09 -1618.78,-898.98 -1618.78,-969.84 -1591.22,-942.28 -1579.41,-954.09 -1614.84,-989.53 -1579.41,-1024.96 -1591.22,-1036.77 -1618.78,-1009.21 -1618.78,-1080.08 -1673.9,-1024.96 ; -1650.28,-1024.96 -1634.53,-1009.21 -1634.53,-1040.71 -1650.28,-1024.96 ; -1650.28,-954.09 -1634.53,-938.35 -1634.53,-969.84 -1650.28,-954.09
  text "3V3IN" at -1723.9,350.91 h40 r270
  text "5VIN" at -1523.9,350.91 h40 r270
  text "GND" at -1423.9,350.91 h40 r270
  text "P0.06" at -1323.9,350.91 h40 r270
  text "P0.08" at -1223.9,350.91 h40 r270
  text "nRF52832" at -260.52,-664.09 h180
  text "nano development kit" at -158.9,-804.09 h80
  text "5" at -1727.12,-1059.81 h200
Top Solder:
  region: -2303.9,394.41 cw(c-2304.55,40.25) -1950.4,40.91 cw(c-2303.25,40.25) -2303.9,-312.59
  region: -2303.9,-312.59 cw(c-2303.99,41.32) -2603.9,-146.59 -2603.9,40.41 -2603.9,229.23 cw(c-2237.21,-28.85) -2476.87,350.14 cw(c-2279.38,-61.44) -2303.9,394.41

## Text inside footprints (layer, text, board x,y; h text height)
U1: Mechanical 7 "ANTEN AREA" at 117.17,-83.9 h45 r270